# Altium PCB PCB1.PcbDoc
Units mm, origin at the board's own origin, x right, y up, seen from the top; angles counter-clockwise.
Board outline 152.4 x 101.6 mm, 2 copper layers (Top Layer, Bottom Layer); 8 components, 3 nets, 16 pads, 36 vias.
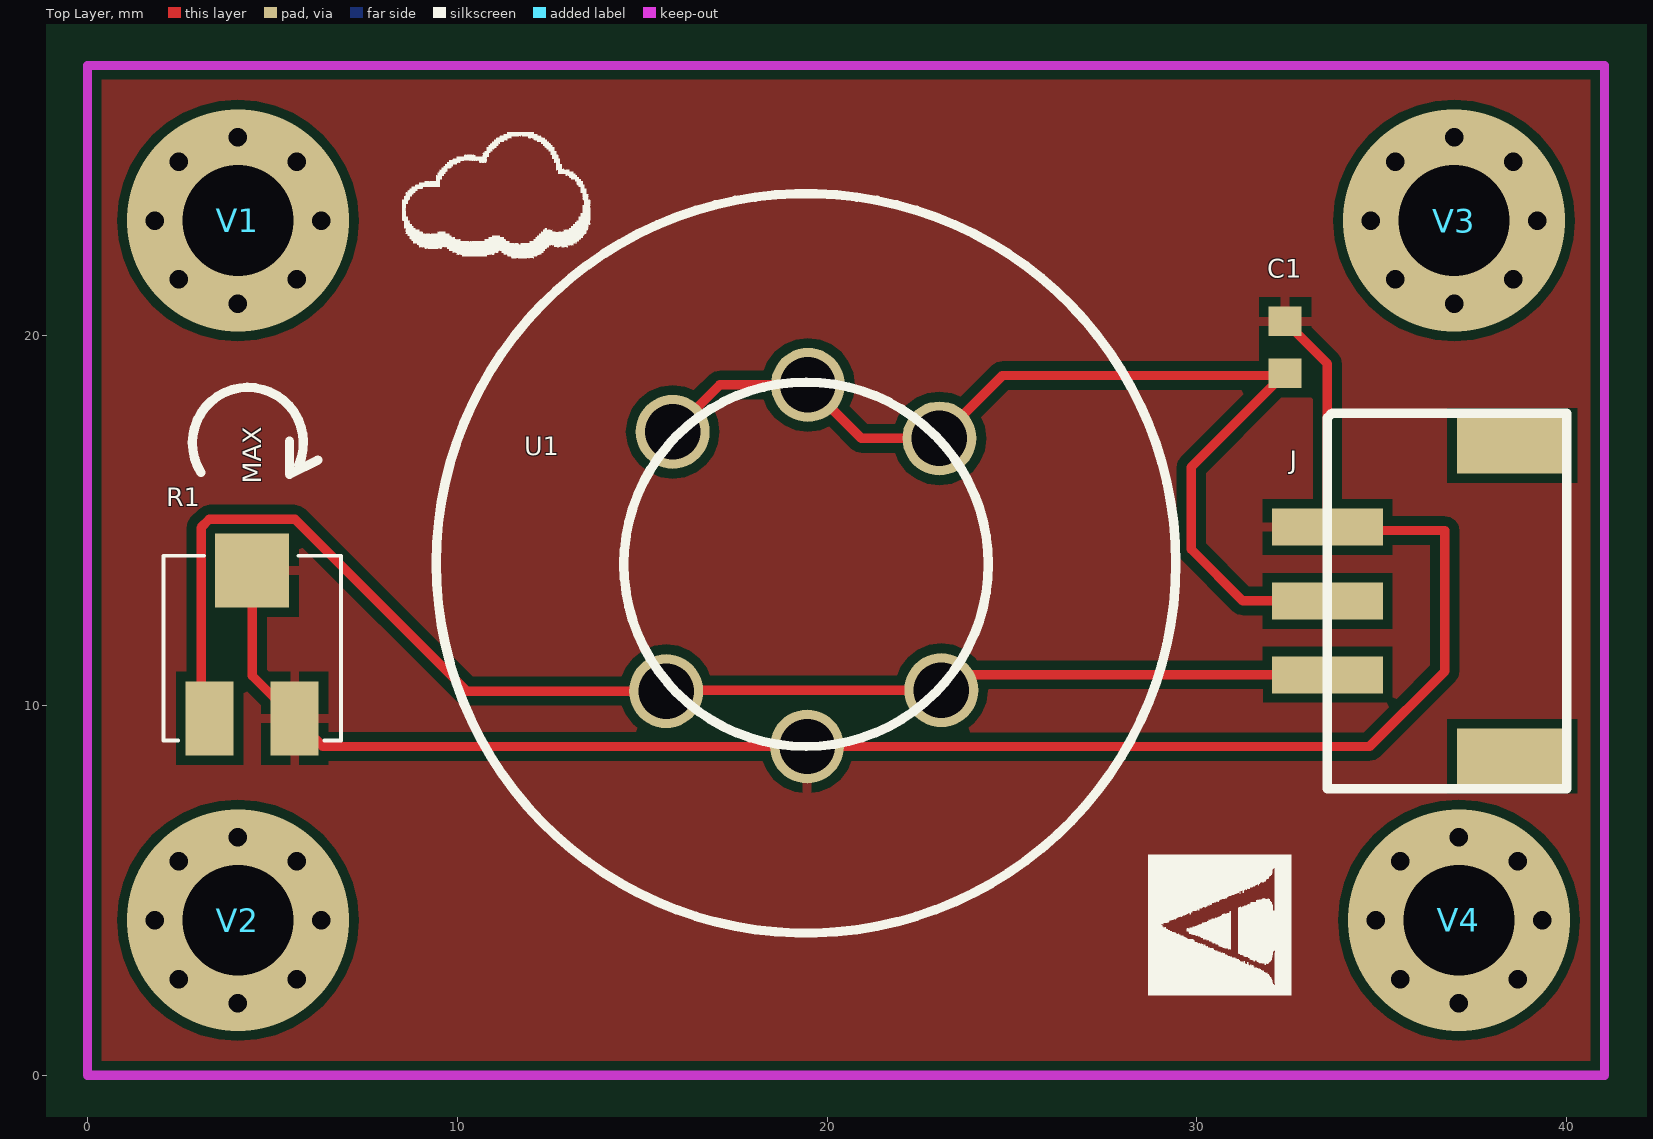
[diagram p0: Top Layer view]
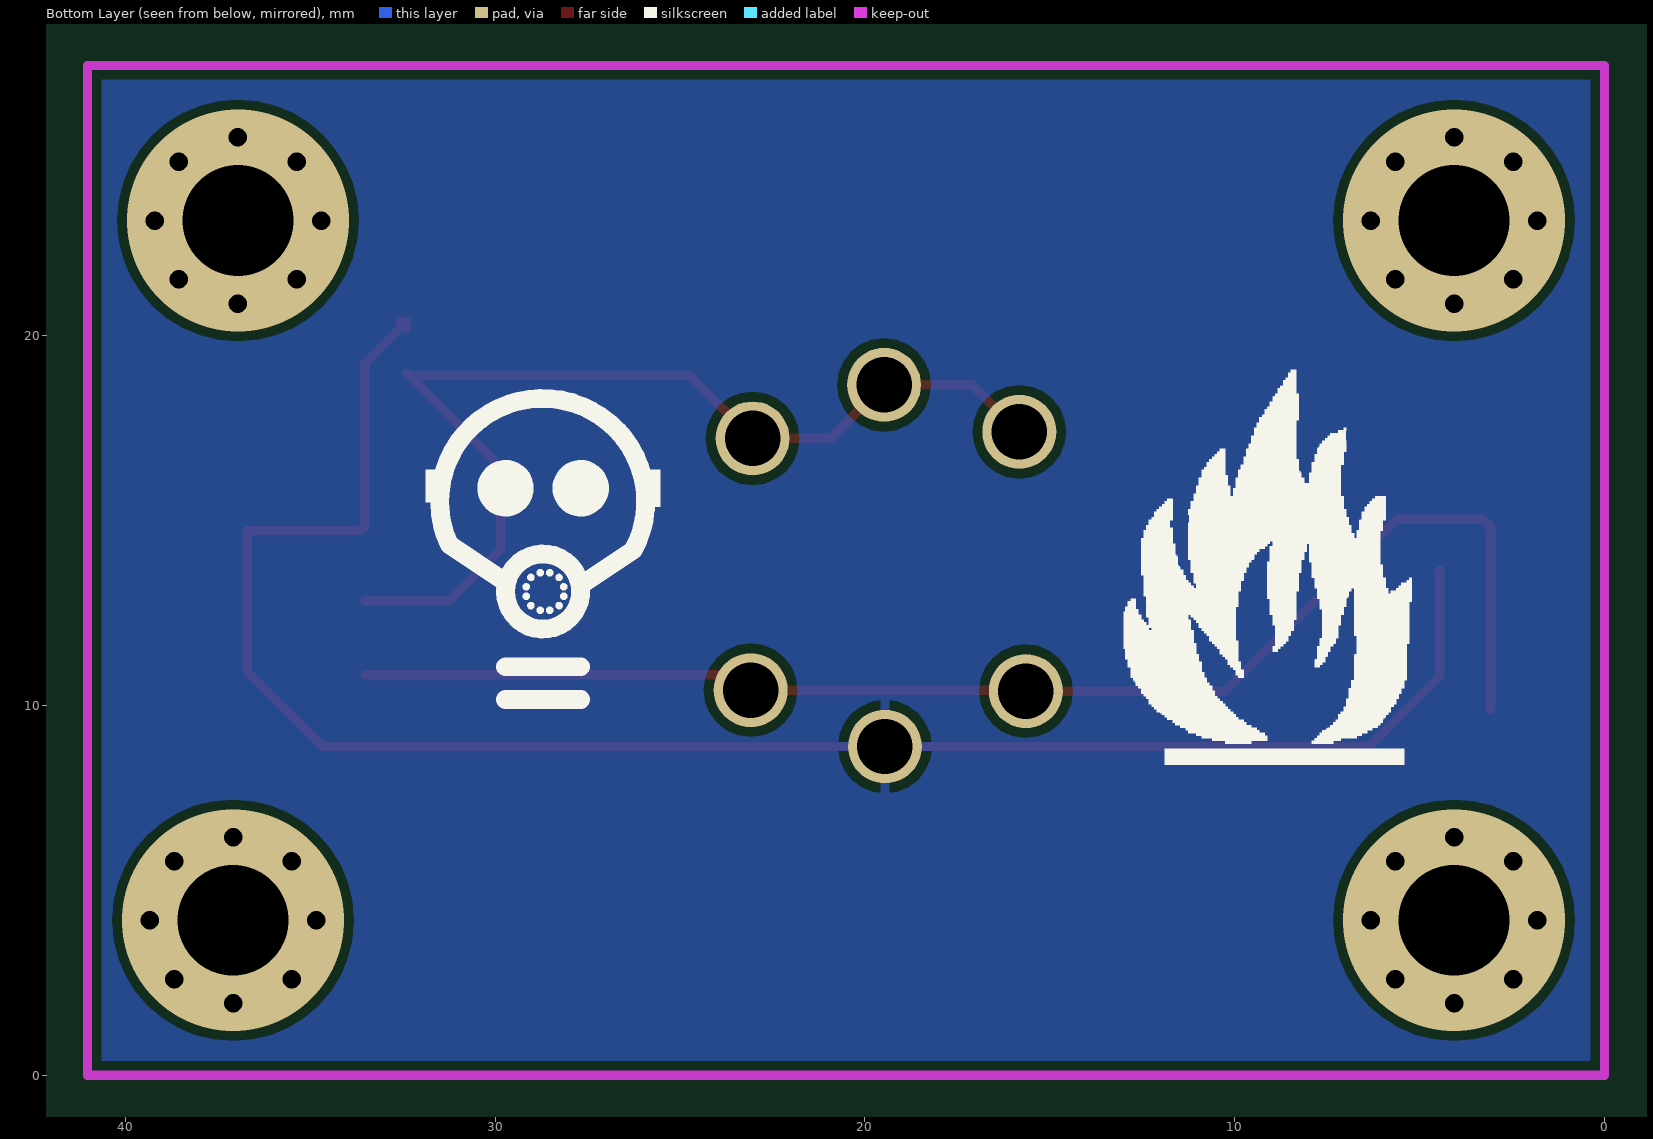
[diagram p1: Bottom Layer view, seen from below]

## Layer stack, top to bottom
Top Layer: signal copper 0.0356
Dielectric: dielectric 0.32, FR-4, Dk 4.8
Bottom Layer: signal copper 0.0356

## Board outline
-57.277,-46.736 95.123,-46.736 95.123,54.864 -57.277,54.864

## Design rules (kind name [scope] priority, off if disabled: settings)
Clearance [All] p1: gap=0.254
PolygonConnect [All] p1: connectstyle=Relief reliefconductorwidth=0.254 reliefentries=4 polygonreliefangle="90 Angle"
RoutingVias [All] p1: holewidth=0.711 width=1.27 viastyle="Through Hole" minholewidth=0.711 minwidth=1.27 maxholewidth=0.711 maxwidth=1.27
SilkscreenOverComponentPads [All] p1: minsilkscreentomaskgap=0.254
SolderMaskExpansion [All] p1: expansion=0.102
Width [All] p1: maxlimit=0.254 minlimit=0.254 preferedwidth=0.254
27 further rules are at their usual default settings.

## Components (designator, comment, footprint, x,y, rotation, side; value= is the part's Value field where it differs from the comment)
C1 "CAP" 1608[0603] 32.385,19.685 r90 top
J "sh-2.0" sh-2.0 33.528,12.827 r90 top
R1 "Res Tap" BORUNS_3314J-1 3.302,9.652 r0 top
U1 "MQ-7" MQ-7 19.431,13.843 r0 top
V1 "Via" VIA 4.064,23.114 r0 top
V2 "Via" VIA 4.064,4.191 r0 top
V3 "Via" VIA 36.957,23.114 r0 top
V4 "Via" VIA 37.084,4.191 r0 top

## Footprints (in the part's own frame and the unit in brackets; to place one, negate y for a bottom-side part, rotate by r counter-clockwise, add the part's x,y. Pads: shape width x height; smd on the part's side, far side on the other; paste and mask are expansions set on the pad)
1608[0603] [mm] "Chip Capacitor, Body 1.6x0.8mm, IPC High Density"
  rect 0.8x0.9 smd: 1(-0.7,0) 2(0.7,0)
  body extent -0.87,-0.48 0.87,0.48, height 1.3
BORUNS_3314J-1 [mm]
  rect 1.3x2 smd: 1(0,0) 2(2.3,0)
  rect 2x2 smd: 3(1.15,4)
  silkscreen extent -1.25,-0.6 3.55,4.4
MQ-7 [mm]
  round 2 hole 1.5: 1(-3.607,3.556) 2(0.051,4.826) 3(3.607,3.378) 4(3.658,-3.429) 5(0.025,-4.953) 6(-3.785,-3.454)
  silkscreen extent -10,-10 10,10
sh-2.0 [mm]
  rect 1x3 smd: 1(-2,0) 2(0,0) 3(2,0)
  rect 1.5x3 smd: GND(-4.2,-5) GND(4.2,-5)
  silkscreen extent -5.08,-6.48 5.08,0
VIA [mm]

## Via types
v1: diameter 1, hole 0.5, Top Layer to Bottom Layer, 32 vias
v2: diameter 6, hole 3, Top Layer to Bottom Layer, 4 vias

## Nets (pads, with @x,y where several pads share a name; then routed paths per layer and width w, separated by ;. In a path a pad name is that pad's centre, name@x,y a point inside that pad or via, vN(x,y) a via of type N, cw(c..) or ccw(c..) an arc to the next point about the centre after c; other vN are vias at no path point)
GND: C1.2 J.3 R1.2 R1.3 U1.5 | length 50.1
  Top Layer w0.254: R1.3 4.452,10.802 R1.2 6.364,8.89 U1.5 34.671,8.89 36.703,10.922 36.703,14.732 33.623,14.732 J.3 33.528,19.242 C1.2@32.481,20.289 ; C1.2@32.385,20.193 C1.2@32.481,20.289 ; C1.2 C1.2@32.481,20.289 ; C1.2@32.577,20.385 C1.2@32.481,20.289
NetC1_1: C1.1 J.2 U1.1 U1.2 U1.3 | length 28.3
  Top Layer w0.254: U1.1 17.094,18.669 U1.2 20.93,17.221 U1.3 24.74,18.923 C1.1@32.258,18.923 ; C1.1 29.845,16.445 29.845,14.224 31.242,12.827 J.2
NetJ_3: J.1 R1.1 U1.4 U1.6 | length 37.6
  Top Layer w0.254: R1.1@3.071,9.883 3.071,14.81 3.294,15.033 5.61,15.033 10.254,10.389 U1.6 15.672,10.414 U1.4 23.502,10.827 J.1
pads on no net: J.GND
copper on no net:
  other v1: 4.064,1.941 37.084,1.941 2.473,2.6 5.655,2.6 35.493,2.6 38.675,2.6 1.814,4.191 6.314,4.191 34.834,4.191 39.334,4.191 2.473,5.782 5.655,5.782 35.493,5.782 38.675,5.782 4.064,6.441 37.084,6.441 4.064,20.864 36.957,20.864 2.473,21.523 5.655,21.523 35.366,21.523 38.548,21.523 1.814,23.114 6.314,23.114 34.707,23.114 39.207,23.114 2.473,24.705 5.655,24.705 35.366,24.705 38.548,24.705 4.064,25.364 36.957,25.364
  other v2: 4.064,4.191 37.084,4.191 4.064,23.114 36.957,23.114

## Polygon pours and split planes (outlines as drawn)
GND on Top Layer "Top Layer-No Net" (solid, pour order 4): 0,0.254 0,27.305 41.021,27.305 41.021,0
GND on Bottom Layer "Top Layer-No Net" (solid, pour order 6): 0,27.305 41.021,27.305 41.021,0 0,0

## Keep-outs
Keep-Out Layer:
  lines w0.254: 0,0 0,27.305 41.021,27.305 41.021,0 0,0

## Silkscreen, mask and mechanical layers (free items; w line width, h text height)
Top Overlay:
  drawing of 6093 lines, arcs and shapes, not listed
  text "MAX" at 4.699,16.002 h0.51 r90
Bottom Overlay:
  drawing of 4129 lines, arcs and shapes, not listed
Top Solder:
  circle w0.5: c19.562,24.384 r0.25
  text "Gas Sensor" at 12.573,1.778 h1